# Altium PCB NanoPLC.PcbDoc
Units mm, origin at the board's own origin, x right, y up, seen from the top; angles counter-clockwise.
Board outline 117 x 88 mm, 2 copper layers (Top, Bottom); 94 components, 84 nets, 303 pads, 33 vias.
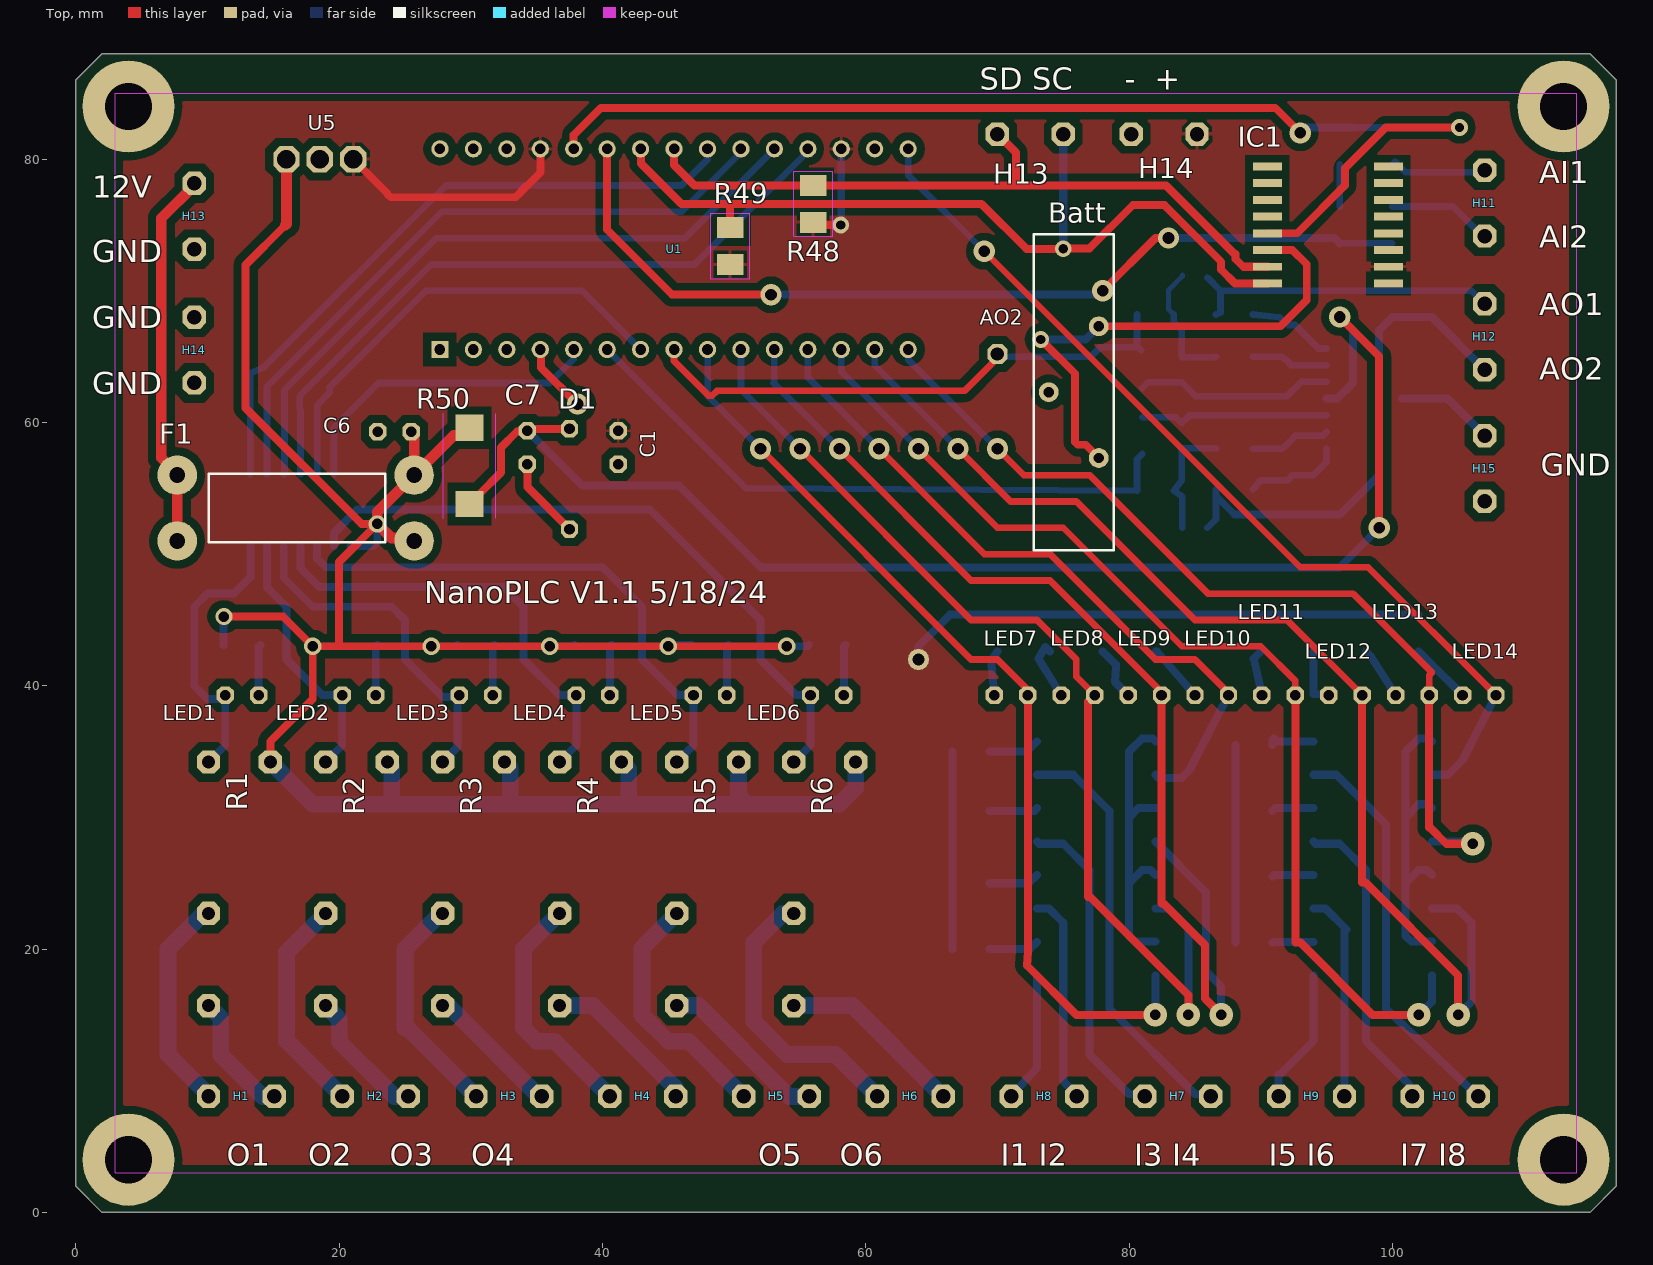
[diagram p0: Top view]
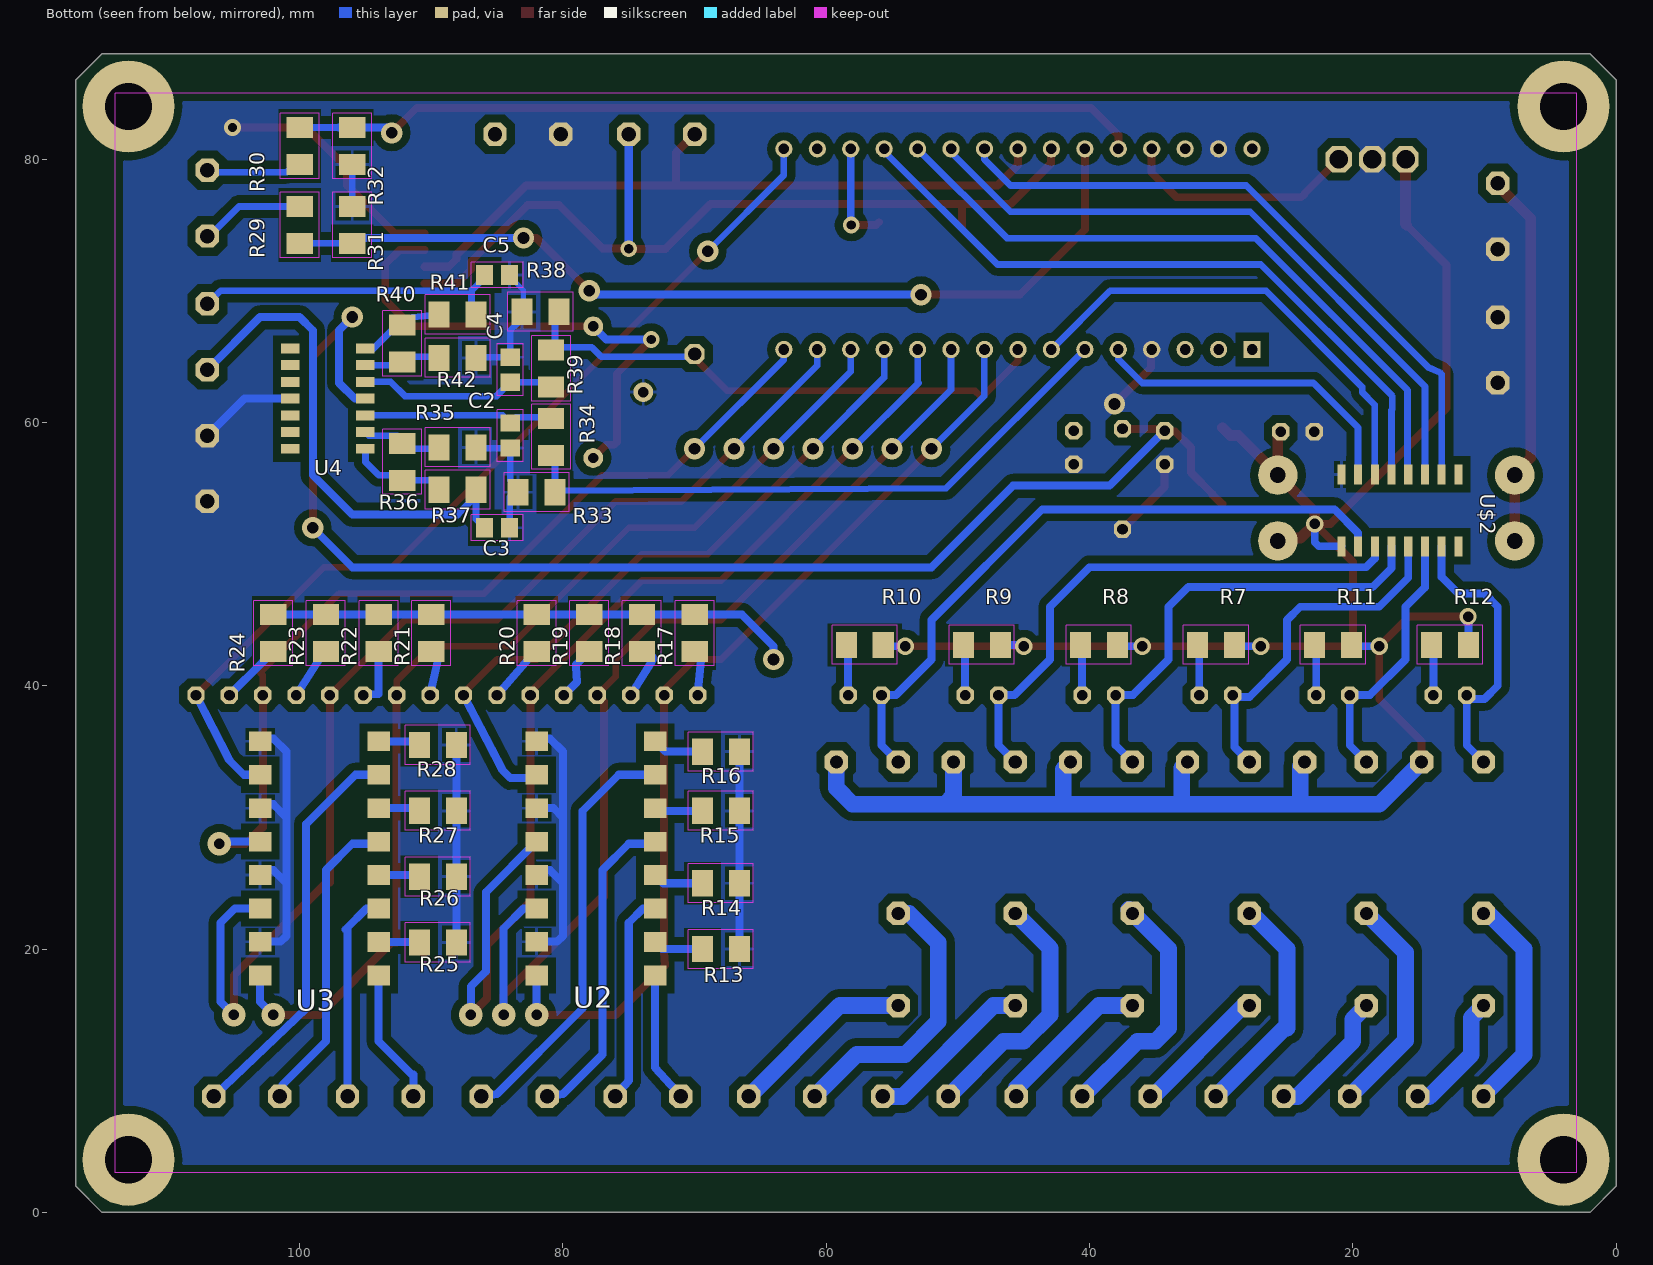
[diagram p1: Bottom view, seen from below]

## Layer stack, top to bottom
Top Solder: solder mask 0.0102, Solder Resist, Dk 3.5
Top: signal copper 0.035
Dielectric 1: dielectric 0.32, FR-4, Dk 4.8
Bottom: signal copper 0.035
Bottom Solder: solder mask 0.0102, Solder Resist, Dk 3.5

## Board outline
2,0 0,2 0,86 2,88 115,88 117,86 117,2 115,0

## Design rules (kind name [scope] priority, off if disabled: settings)
BoardOutlineClearance mdCopperDimension [All] p1: gap=0.254 ignorepadtopadclearanceinfootprint=FALSE except(0: Arc-SplitContinuation Track-SplitContinuation SMDPad-SplitContinuation THPad-SplitContinuation Via-SplitContinuation Fill-SplitContinuation Poly-SplitContinuation Region-SplitContinuation Text-SplitContinuation; 1.016: Poly-OutlineEdge Poly-CavityEdge Poly-CutoutEdge Poly-SplitBarrior)
Clearance Clearance_1 [InNamedPolygon('Polygon_1_Net_GND')] p1: gap=0.6 ignorepadtopadclearanceinfootprint=FALSE
Clearance 5VPoly [InNamedPolygon('Polygon_1_Net_+5V')] p2: gap=0.6 ignorepadtopadclearanceinfootprint=FALSE except(0.254: Arc-Arc Arc-Track Arc-SMDPad Track-Track Track-SMDPad)
Clearance Clearance_for_PolygonClass_Isolate_32 [InPolygonClass('Isolate_32') vs IsArc Or IsTrack Or IsPad Or IsVia Or IsFill Or IsRegion Or IsText] p3: gap=0.813 ignorepadtopadclearanceinfootprint=FALSE
Clearance "Clearance (Same Net)" [All] p4: gap=0.152 ignorepadtopadclearanceinfootprint=FALSE
Clearance [All] p5: gap=0.152 ignorepadtopadclearanceinfootprint=FALSE
ComponentClearance [All] p1: gap=0.127 collisioncheckmode=3 verticalgap=0.254 showdistances=FALSE
HoleSize [All] p1: absolutevalues=TRUE maxlimit=2540 minlimit=0.35 maxpercent=80.000 minpercent=20.000
HoleToHoleClearance mdDrill [All] p1: gap=0.152 allowstackedmicrovias=TRUE
MinimumSolderMaskSliver [All] p1 off: minsoldermaskwidth=0.254
PasteMaskExpansion mlMinCreamFrame [All] p1: expansion=0
PolygonConnect PolygonConnect_For_PolygonThermal_ON_Width200000_Gap100000 [InPolygonClass('PolygonThermal_ON_Width200000_Gap100000') vs Not IsVia] p1: connectstyle=Relief reliefconductorwidth=0.508 reliefentries=4 polygonreliefangle="90 Angle" airgapwidth=0.254
PolygonConnect ThermalVias [IsVia] p2: connectstyle=Direct reliefconductorwidth=0.254 reliefentries=4 polygonreliefangle="90 Angle" airgapwidth=0.254
PolygonConnect [All] p3: connectstyle=Relief reliefconductorwidth=0.254 reliefentries=4 polygonreliefangle="90 Angle" airgapwidth=0.254
RoutingVias [All] p1: holewidth=0.35 width=0.756 viastyle="Through Hole" minholewidth=0.35 minwidth=0.756 maxholewidth=2.54 maxwidth=2.54
SolderMaskExpansion mlMinStopFrame [All] p1: expansion=0.102 istentingtop=FALSE
Width [All] p1: maxlimit=1.524 minlimit=0.254 preferedwidth=0.584 minimp=50.000000 maximp=50.000000 favimp=50.000000
25 further rules are at their usual default settings.

## Components (designator, comment, footprint, x,y, rotation, side; value= is the part's Value field where it differs from the comment)
AO2 "PINHD-1X1" 1X01 70,65.2 r0 top
Batt "BatteryHolder_20mm" BatteryHolderVertical 77.7,62.3 r180 top (schematic designator BATT)
C1 "CAPACITOR, American symbol" C025-040X050 41.2,58.1 r270 top
C2 "C-USC0805" C0805 84,59 r270 bottom
C3 "C-USC0805" C0805 85,52 r180 bottom
C4 "C-USC0805" C0805 84,64 r90 bottom
C5 "C-USC0805" C0805 85,71.2 r180 bottom
C6 "CAPACITOR, American symbol" C025-040X050 24.2,59.3 r180 top
C7 "CAPACITOR, American symbol" C025-040X050 34.3,58.1 r270 top
D1 "Zener" 0204$7 37.5,55.7 r90 top
F1 "RESISTOR, American symbol" 20mm_Fuseholder 7.7,53.5 r0 top
H1 "TERMBLOCK_5MM_2POS" TERMBLOCK_5MM_2POS 10.08,8.81 r0 top
H2 "TERMBLOCK_5MM_2POS" TERMBLOCK_5MM_2POS 20.24,8.81 r0 top
H3 "TERMBLOCK_5MM_2POS" TERMBLOCK_5MM_2POS 30.4,8.81 r0 top
H4 "TERMBLOCK_5MM_2POS" TERMBLOCK_5MM_2POS 40.56,8.81 r0 top
H5 "TERMBLOCK_5MM_2POS" TERMBLOCK_5MM_2POS 50.72,8.81 r0 top
H6 "TERMBLOCK_5MM_2POS" TERMBLOCK_5MM_2POS 60.88,8.81 r0 top
H7 "TERMBLOCK_5MM_2POS" TERMBLOCK_5MM_2POS 81.2,8.81 r0 top
H8 "TERMBLOCK_5MM_2POS" TERMBLOCK_5MM_2POS 71.04,8.81 r0 top
H9 "TERMBLOCK_5MM_2POS" TERMBLOCK_5MM_2POS 91.36,8.81 r0 top
H10 "TERMBLOCK_5MM_2POS" TERMBLOCK_5MM_2POS 101.52,8.81 r0 top
H11 "TERMBLOCK_5MM_2POS" TERMBLOCK_5MM_2POS 107,74.16 r90 top
H12 "TERMBLOCK_5MM_2POS" TERMBLOCK_5MM_2POS 107,64 r90 top
H13 "TERMBLOCK_5MM_2POS" TERMBLOCK_5MM_2POS 75,81.9 r180 top
H13 "TERMBLOCK_5MM_2POS" TERMBLOCK_5MM_2POS 9,78.16 r270 top
H14 "TERMBLOCK_5MM_2POS" TERMBLOCK_5MM_2POS 85.16,81.9 r180 top
H14 "TERMBLOCK_5MM_2POS" TERMBLOCK_5MM_2POS 9,68 r270 top
H15 "TERMBLOCK_5MM_2POS" TERMBLOCK_5MM_2POS 107,54 r90 top
IC1 "Check availability" SO16W 95.1,75 r90 top
LED1 "LED3MM" LED3MM 12.62,39.29 r180 top
LED2 "LED3MM" LED3MM 21.51,39.29 r180 top
LED3 "LED3MM" LED3MM 30.4,39.29 r180 top
LED4 "LED3MM" LED3MM 39.29,39.29 r180 top
LED5 "LED3MM" LED3MM 48.18,39.29 r180 top
LED6 "LED3MM" LED3MM 57.07,39.29 r180 top
LED7 "LED3MM" LED3MM 71.04,39.29 r0 top
LED8 "LED3MM" LED3MM 76.12,39.29 r0 top
LED9 "LED3MM" LED3MM 81.2,39.29 r0 top
LED10 "LED3MM" LED3MM 86.28,39.29 r0 top
LED11 "LED3MM" LED3MM 91.36,39.29 r0 top
LED12 "LED3MM" LED3MM 96.44,39.29 r0 top
LED13 "LED3MM" LED3MM 101.52,39.29 r0 top
LED14 "LED3MM" LED3MM 106.6,39.29 r0 top
R1 "G5NB-1A-E-12VDC" G5NB-1A-E-12VDC 10.08,34.21 r270 top
R2 "G5NB-1A-E-12VDC" G5NB-1A-E-12VDC 18.97,34.21 r270 top
R3 "G5NB-1A-E-12VDC" G5NB-1A-E-12VDC 27.86,34.21 r270 top
R4 "G5NB-1A-E-12VDC" G5NB-1A-E-12VDC 36.75,34.21 r270 top
R5 "G5NB-1A-E-12VDC" G5NB-1A-E-12VDC 45.64,34.21 r270 top
R6 "G5NB-1A-E-12VDC" G5NB-1A-E-12VDC 54.53,34.21 r270 top
R7 "R-US_M1206" M1206 30.4,43.1 r0 bottom
R8 "R-US_M1206" M1206 39.29,43.1 r0 bottom
R9 "R-US_M1206" M1206 48.18,43.1 r0 bottom
R10 "R-US_M1206" M1206 57.07,43.1 r0 bottom
R11 "R-US_M1206" M1206 21.51,43.1 r0 bottom
R12 "R-US_M1206" M1206 12.62,43.1 r0 bottom
R13 "R-US_M1206" M1206 68,20 r0 bottom
R14 "R-US_M1206" M1206 68,25 r0 bottom
R15 "R-US_M1206" M1206 68,30.5 r0 bottom
R16 "R-US_M1206" M1206 68,35 r0 bottom
R17 "R-US_M1206" M1206 70,44 r90 bottom
R18 "R-US_M1206" M1206 74,44 r90 bottom
R19 "R-US_M1206" M1206 78,44 r90 bottom
R20 "R-US_M1206" M1206 82,44 r90 bottom
R21 "R-US_M1206" M1206 90,44 r90 bottom
R22 "R-US_M1206" M1206 94,44 r90 bottom
R23 "R-US_M1206" M1206 98,44 r90 bottom
R24 "R-US_M1206" M1206 102,44 r90 bottom
R25 "R-US_M1206" M1206 89.5,20.5 r0 bottom
R26 "R-US_M1206" M1206 89.5,25.5 r0 bottom
R27 "R-US_M1206" M1206 89.5,30.5 r0 bottom
R28 "R-US_M1206" M1206 89.5,35.5 r0 bottom
R29 "22k" M1206 100,75 r90 bottom
R30 "22k" M1206 100,81 r270 bottom
R31 "22k" M1206 96,75 r270 bottom
R32 "22k" M1206 96,81 r90 bottom
R33 "22K" M1206 82,54.7 r180 bottom
R34 "6k8" M1206 80.9,58.9 r90 bottom
R35 "22k" M1206 88,58.1 r0 bottom
R36 "22k" M1206 92.2,57 r270 bottom
R37 "330" M1206 88,54.9 r180 bottom
R38 "22K" M1206 81.7,68.4 r180 bottom
R39 "6k8" M1206 80.9,64.1 r270 bottom
R40 "22k" M1206 92.2,66 r90 bottom
R41 "330" M1206 88,68.2 r180 bottom
R42 "22k" M1206 88,64.9 r0 bottom
R48 "R-US_M1206" M1206 56,76.6 r270 top
R49 "R-US_M1206" M1206 49.7,73.4 r270 top
R50 "RESISTOR, American symbol" R2512W 29.9,56.7 r90 top
U1 "NANO" NANO 27.66,65.54 r0 top
U2 "LTV-847" SM-16 73,18 r0 bottom
U3 "LTV-847" SM-16 94,18 r0 bottom
U4 "LM224" SOIC-14_4MM 95,58 r0 bottom
U5 "L7805CV" TO-220 16,80 r0 top
U$2 "ULN2003" SOIC-16 16.43,53.26 r0 bottom

## Footprints (in the part's own frame and the unit in brackets; to place one, negate y for a bottom-side part, rotate by r counter-clockwise, add the part's x,y. Pads: shape width x height; smd on the part's side, far side on the other; paste and mask are expansions set on the pad)
1X01 [mil] "1X01"
  oct 60x60 / inner round 55.43 / far side oct 60x60 hole 40: 1(0,0)
  body extent -28,-28 28,28, height 150
20mm_Fuseholder [mm]
  round 3 hole 1.2: 1(0,-2.5) 1(0,2.5) 2(18,-2.5) 2(18,2.5)
  silkscreen extent 2.4,-2.6 15.8,2.6
0204$7 [mil]
  oct 52x52 / inner round 48.04 / far side oct 52x52 hole 32: 1(-150,0) 2(150,0)
BatteryHolderVertical [mm]
  round 1.5 hole 0.78: 1(0,5) 1(0,-5) 2(3.8,0)
  silkscreen extent -1.15,-12 4.95,12
C025-040X050 [mil]
  oct 52x52 / inner round 48.04 / far side oct 52x52 hole 32: 1(-50,0) 2(50,0)
C0805 [mm] "C0805"
  rect 1.3x1.5 smd: 1(-0.95,0) 2(0.95,0)
  Top keep-out lines w0.051: 1.973,0.983 1.973,-0.983 -1.973,-0.983 -1.973,0.983 1.973,0.983
G5NB-1A-E-12VDC [mil] "G5NB-1A-E-12VDC"
  oct 70x70 / inner round 64.67 / far side oct 70x70 hole 39.37: 1(0,0) 2(452.76,0) 3(728.35,0) 4(0,185.04)
LED3MM [mil] "LED3MM"
  oct 52x52 / inner round 48.04 / far side oct 52x52 hole 32: A(-50,0) K(50,0)
  body extent -85,-55 74,55, height 150
M1206 [mm] "M1206"
  rect 1.6x2 smd: 1(-1.4,0) 2(1.4,0)
  Top keep-out lines w0.051: -2.473,1.483 -2.473,-1.483 2.473,-1.483 2.473,1.483 -2.473,1.483
NANO [mil] "NANO"
  rect 51.5x51.5 / inner round 47.58 / far side rect 51.5x51.5 hole 31.5: 1(0,0)
  round 51.5 hole 31.5: 2(100,0) 3(200,0) 4(300,0) 5(400,0) 6(500,0) 7(600,0) 8(700,0) 9(800,0) 10(900,0) 11(1000,0) 12(1100,0) 13(1200,0) 14(1300,0) 15(1400,0) 16(1400,600) 17(1300,600) 18(1200,600) 19(1100,600) 20(1000,600) 21(900,600) 22(800,600) 23(700,600) 24(600,600) 25(500,600) 26(400,600) 27(300,600) 28(200,600) 29(100,600) 30(0,600)
R2512W [mm]
  rect 2x2.1 smd: 1(-2.896,0) 2(2.896,0)
  Top keep-out lines w0.051: -3.973,1.983 3.973,1.983 ; -3.973,-1.983 3.973,-1.983
SM-16 [mm] "SM-16"
  rect 1.7x1.5 smd: 1(0,0) 2(0,-2.54) 3(0,-5.08) 4(0,-7.62) 5(0,-10.16) 6(0,-12.7) 7(0,-15.24) 8(0,-17.78) 9(9,-17.78) 10(9,-15.24) 11(9,-12.7) 12(9,-10.16) 13(9,-7.62) 14(9,-5.08) 15(9,-2.56) 16(9,0)
SO16W [mm]
  rect 0.6x2.2 smd: 1(-4.445,-4.6) 2(-3.175,-4.6) 3(-1.905,-4.6) 4(-0.635,-4.6) 5(0.635,-4.6) 6(1.905,-4.6) 7(3.175,-4.6) 8(4.445,-4.6) 9(4.445,4.6) 10(3.175,4.6) 11(1.905,4.6) 12(0.635,4.6) 13(-0.635,4.6) 14(-1.905,4.6) 15(-3.175,4.6) 16(-4.445,4.6)
SOIC-14_4MM [mm] "SOIC-14_4MM"
  rect 1.4x0.75 smd: 1(0,0) 2(0,-1.27) 3(0,-2.54) 4(0,-3.81) 5(0,-5.08) 6(0,-6.35) 7(0,-7.62) 8(5.72,-7.62) 9(5.72,-6.35) 10(5.72,-5.08) 11(5.72,-3.81) 12(5.72,-2.54) 13(5.72,-1.27) 14(5.72,0)
SOIC-16 [mil] "SOIC-16"
  rect 24x60 smd: 1(-175,-110) 2(-125,-110) 3(-75,-110) 4(-25,-110) 5(25,-110) 6(75,-110) 7(125,-110) 8(175,-110) 9(175,105) 10(125,105) 11(75,105) 12(25,105) 13(-25,105) 14(-75,105) 15(-125,105) 16(-175,105)
TERMBLOCK_5MM_2POS [mil] "TERMBLOCK_5MM_2POS"
  oct 70x70 / inner round 64.67 / far side oct 70x70 hole 43.3: 1(0,0) 2(196.85,0)
TO-220 [mm] "TO-220"
  oct 2x2 / inner round 1.848 / far side oct 2x2 hole 1.4: 1(0,0) 2(2.54,0) 3(5.08,0)

## Part data
AO2: "PIN HEADER", DeviceSetName=PINHD-1X1, GateName_1=G$1, LibraryName=pinhead, POPULARITY=64, SymbolName_1=PINHD1
C1 C6 C7: library part C-US025-040X050, PACKAGE=C025-040X050, DeviceName=025-040X050, DeviceSetName=C-US, GateName_1=G$1, LibraryName=DR, SymbolName_1=C-US
C2 C3 C4 C5: "CAPACITOR, American symbol", DeviceName=C0805, DeviceSetName=C-US, GateName_1=G$1, LibraryName=DR, SymbolName_1=C-US
D1: library part R-US_0207/7, PACKAGE=0207/7, DeviceName=0207/7, DeviceSetName=R-US_, GateName_1=G$1, LibraryName=DR, SymbolName_1=R-US
F1: library part R-US_M5923_1, PACKAGE=M5923, DeviceName=M5923, DeviceSetName=R-US_, GateName_1=G$1, LibraryName=DR, SymbolName_1=R-US
IC1: library part DS3231/SO, PACKAGE="SOIC-16 Maxim Integrated", AVAILABILITY="In Stock", CHECK_PRICES=https://www.snapeda.com/parts/DS3231/Analog+Devices/view-part/?ref=eda, DeviceName=/SO, DeviceSetName=DS3231, GateName_1=G$1, LibraryName=DR, MF="Analog Devices", MP=DS3231, PRICE=None, SNAPEDA_LINK=https://www.snapeda.com/parts/DS3231/Analog+Devices/view-part/?ref=snap, SymbolName_1=DS3231
LED1 LED2 LED3 LED4 LED5 LED6 LED7 LED8 LED9 LED10 LED11 LED12 LED13 LED14: "LED   OSRAM: - CHIPLED LG R971, LG N971, LY N971, LG Q971, LY Q971, LO R971, LY R971 LH N974, LH R974 LS Q976, LO Q976, LY Q976 LO Q996 - Hyper CHIPLED LW Q18S LB Q993, LB Q99A, LB R99A - SideLED LS A670, LO A670, LY A670, LG A670, LP A670 LB A673, LV A673, LT A673, LW A673 LH A674 LY A675 LS A676, LA A676, LO A676, LY A676, LW A676 LS A679, LY A679, LG A679 -  Hyper Micro SIDELEDÂ® LS Y876, LA Y876, LO Y876, LY Y876 LT Y87S - SmartLED LW L88C, LW L88S LB L89C, LB L89S, LG L890 LS L89K, LO L89K, LY L89K LS L896, LA L896, LO L896, LY L896 - TOPLED LS T670, LO T670, LY T670, LG T670, LP T670 LSG T670, LSP T670, LSY T670, LOP T670, LYG T670 LG T671, LOG T671, LSG T671 LB T673, LV T673, LT T673, LW T673 LH T674 LS T676, LA T676, LO T676, LY T676, LB T676, LH T676, LSB T676, LW T676 LB T67C, LV T67C, LT T67C, LS T67K, LO T67K, LY T67K, LW E67C LS E67B, LA E67B, LO E67B, LY E67B, LB E67C, LV E67C, LT E67C LW T67C LS T679, LY T679, LG T679 LS T770, LO T770, LY T770, LG T770, LP T770 LB T773, LV T773, LT T773, LW T773 LH T774 LS E675, LA E675, LY E675, LS T675 LS T776, LA T776, LO T776, LY T776, LB T776 LHGB T686 LT T68C, LB T68C - Hyper Mini TOPLEDÂ® LB M676 - Mini TOPLED SantanaÂ® LG M470 LS M47K, LO M47K, LY M47K    Source: http://www.osram.convergy.de   LUXEON: - LUMILEDÂ® LXK2-PW12-R00, LXK2-PW12-S00, LXK2-PW14-U00, LXK2-PW14-V00 LXK2-PM12-R00, LXK2-PM12-S00, LXK2-PM14-U00 LXK2-PE12-Q00, LXK2-PE12-R00, LXK2-PE12-S00, LXK2-PE14-T00, LXK2-PE14-U00 LXK2-PB12-K00, LXK2-PB12-L00, LXK2-PB12-M00, LXK2-PB14-N00, LXK2-PB14-P00, LXK2-PB14-Q00 LXK2-PR12-L00, LXK2-PR12-M00, LXK2-PR14-Q00, LXK2-PR14-R00 LXK2-PD12-Q00, LXK2-PD12-R00, LXK2-PD12-S00 LXK2-PH12-R00, LXK2-PH12-S00 LXK2-PL12-P00, LXK2-PL12-Q00, LXK2-PL12-R00    Source: www.luxeon.com   KINGBRIGHT:   KA-3528ASYC Source: www.kingbright.com", DeviceName=3MM, DeviceSetName=LED, GateName_1=G$1, LibraryName=led, POPULARITY=97, SymbolName_1=LED
R7 R8 R9 R10 R11 R12 R13 R14 R15 R16 R17 R18 R19 R20 R21 R22 R23 R24 R25 R26 R27 R28 R48 R49: "RESISTOR, American symbol", DeviceName=M1206, DeviceSetName=R-US_, GateName_1=G$1, LibraryName=DR, SymbolName_1=R-US
R29 R30 R31 R32 R33 R34 R35 R36 R37 R38 R39 R40 R41 R42: library part R-US_M1206, "RESISTOR, American symbol", DeviceName=M1206, DeviceSetName=R-US_, GateName_1=G$1, LibraryName=DR, SymbolName_1=R-US
R50: library part R-US_R2512W, PACKAGE=R2512W, DeviceName=R2512W, DeviceSetName=R-US_, GateName_1=G$1, LibraryName=DR, SymbolName_1=R-US
U2 U3: "OptoIsolator", DeviceSetName=LTV-847, GateName_1=G$1, LibraryName=DR, SymbolName_1=LTV-847
U4: "LM224 Op Amp", DeviceSetName=LM224, GateName_1=G$1, LibraryName=DR, lm224=lm224, SymbolName_1=LM224
H1 H2 H3 H4 H5 H6 H7 H8 H9 H10 H11 H12 H13 H13 H14 H14 H15: DeviceSetName=TERMBLOCK_5MM_2POS, GateName_1=G$1, LibraryName=DR, SymbolName_1=PINHEAD-2
R1 R2 R3 R4 R5 R6: DeviceSetName=G5NB-1A-E-12VDC, GateName_1=G$1, LibraryName=DR, SymbolName_1=RELAY_SPST
U1: DeviceSetName=NANO, GateName_1=G$1, ICSP=ICSP, LibraryName=DR, SymbolName_1=NANO
U5: 7805=7805, DeviceSetName=L7805CV, GateName_1=G$1, LibraryName=DR, SymbolName_1=7805
U$2: DeviceSetName=ULN2003, GateName_1=G$1, LibraryName=DR, SymbolName_1=UNL2003, UNL2003=UNL2003

## Free pads (board coordinates)
  round 7 hole 3.6: 2(4,4) 2(4,84) 2(113,4) 2(113,84)

## Via types
v1: diameter 1.6/1.6 (per signal layer), hole 0.9, Top to Bottom, 16 vias
v2: diameter 1.3/1.3 (per signal layer), hole 0.8, Top to Bottom, 7 vias
v3: diameter 1.778/1.778 (per signal layer), hole 0.8, Top to Bottom, 6 vias
v4: diameter 1.27, hole 0.711, Top to Bottom, 4 vias

## Nets (pads, with @x,y where several pads share a name; then routed paths per layer and width w, separated by ;. In a path a pad name is that pad's centre, name@x,y a point inside that pad or via, vN(x,y) a via of type N, cw(c..) or ccw(c..) an arc to the next point about the centre after c; other vN are vias at no path point)
+5V: C1.1 H14.1@85.16,81.9 IC1.2 R17.2 R18.2 R19.2 R20.2 R21.2 R22.2 R23.2 R24.2 R48.2 R49.2 U1.18 U1.27 U5.3 | length 66
  Top w0.584: U5.3 23.7,77.38 23.7,77.316 23.916,77.1 33.4,77.1 35.3,79 35.3,80.76 U1.27 ; R48.2 56.2,75 v4(58.1,75)
  Bottom w0.584: v4(58.1,75) 58.14,75.04 U1.18
  Bottom w0.61: v1(64,42) 64,43 66.4,45.4 R17.2 R18.2 R19.2 R20.2 R21.2 R22.2 R23.2 R24.2
+11V: C7.1 D1.2 R50.1 U4.4 | length 106.5
  Top w0.61: R50.1 29.95,53.804 30.645,54.499 30.645,54.549 32.3,56.204 32.3,58.1 33.497,59.297 34.227,59.297 C7.1 34.44,59.51 D1.2 ; v1(96,68) 99,65 v1(99,52)
  Bottom w0.61: C7.1 38.47,55.2 45.8,55.2 52,49 96,49 v1(99,52) ; U4.4 95.81,61.81 97,63 97,67 v1(96,68)
+12V: C6.1 F1.2 R1.4 R2.4 R3.4 R4.4 R5.4 R6.4 R7.1 R8.1 R9.1 R10.1 R11.1 R12.1 R50.2 U5.1 U$2.9 | length 192.9
  Top w0.6: v2(11.25,45.25) 15.75,45.25 v2(18,43) ; R1.4 14.78,35.78 18,39 v2(18,43) ; v2(22.9,52.3) 20,49.4 20,43 ; v2(54,43) v2(45,43) v2(36,43) v2(27,43) 20,43 ; v2(18,43) 20,43
  Top w0.61: 15.903,74.972 12.9,71.97 12.9,61.1 21.7,52.3 v2(22.9,52.3)
  Top w0.813: 15.903,74.972 16,75.07 U5.1 ; C6.1 25.47,59.208 25.7,58.978 F1.2@25.7,56 ; F1.2@25.7,51 25.477,51.223 23.977,51.223 v2(22.9,52.3) 22.9,53.2 F1.2@25.7,56 ; R50.2 29.306,59.003 28.703,59.003 F1.2@25.7,56
  Bottom w0.6: R12.1 11.22,44.72 11.5,45 v2(11.25,45.25) ; v2(18,43) 20.01,43 R11.1 ; U$2.9 22.593,50.593 22.9,50.9 v2(22.9,52.3) ; v2(27,43) 28.9,43 R7.1 ; v2(36,43) 37.79,43 R8.1 ; v2(45,43) 45.1,43.1 R9.1 ; v2(54,43) 55.57,43 R10.1
  Bottom w1.27: R1.4 17.99,31 24,31 ; R2.4 24,33.88 24,31 ; R3.4 33,33.77 33,31 ; R4.4 42,33.66 42,31 ; R5.4 50.34,31.66 51,31 ; R6.4 59.23,32.23 58,31 51,31 ; 24,31 33,31 ; 33,31 42,31 ; 42,31 51,31
AI1: R29.1 R31.2 U1.25 | length 69.8
  Top w0.61: U1.25 40.36,74.64 45.3,69.7 v1(52.8,69.7) ; v1(78,70) 82,74 v1(83,74)
  Bottom w0.508: R31.2 R29.1
  Bottom w0.61: v1(52.8,69.7) 77.432,69.7 77.732,70 v1(78,70) ; v1(83,74) 95.6,74 R31.2
AI2: R30.1 R32.2 U1.26 | length 66
  Top w0.61: U1.26 37.82,81.82 39.9,83.9 91.1,83.9 v1(93,82)
  Bottom w0.508: R32.2 97,82.4 R30.1
  Bottom w0.61: v1(93,82) 93.4,82.4 97,82.4
AO1: R33.2 R34.1 U1.6 | length 47.6
  Bottom w0.508: U1.6 50.9,55 80.6,54.8 80.6,57.2 R34.1@81,57.6
AO2: AO2.1 R38.2 R39.1 U1.8 | length 41.8
  Top w0.508: U1.8 45.44,64.66 48.063,62.037 48.337,62.037 48.7,62.4 67.5,62.4 69.621,64.521 69.621,64.589 70,64.968 AO2.1
  Bottom w0.508: AO2.1 70.2,65 77.1,65 77.8,65.7 80.7,65.7 R39.1 ; R39.1@80.6,65.8 R38.2@80.6,68.2
DI1: LED7.K U1.9 U2.16 | length 72.4
  Top w0.508: v1(52,58) 68,42 70,42 72.31,39.69 LED7.K
  Top w0.61: LED7.K 72.31,19.771 72.23,18.77 76,15 v3(82,15)
  Bottom w0.508: U1.9 48,65.52 48,62 v1(52,58)
  Bottom w0.61: v3(82,15) U2.16
DI2: LED8.K U1.10 U2.14 | length 77.7
  Top w0.508: v1(55,58) 68,45 73,45 76,42 76,40.68 LED8.K
  Top w0.61: LED8.K 76.89,38.79 76.89,23.974 77.045,23.955 84.5,16.5 v3(84.5,15)
  Bottom w0.508: U1.10 50.52,62.48 v1(55,58)
  Bottom w0.61: U2.14 83,23.08 84.5,21.58 v3(84.5,15)
DI3: LED9.K U1.11 U2.12 | length 83.5
  Top w0.508: v1(58,58) 68,48 74,48 82.47,39.53 LED9.K
  Top w0.61: LED9.K 82.47,23.481 82.62,23.458 85.762,20.316 85.762,16.238 v3(87,15)
  Bottom w0.508: U1.11 53.06,63.06 53,63 v1(58,58)
  Bottom w0.61: U2.12 85.843,24.317 85.843,18.311 87,17.153 v3(87,15)
DI4: LED10.K U1.12 U2.10 | length 53.5
  Top w0.508: v1(61,58) 69,50 74,50 82,42 85,42 87.55,39.45 LED10.K
  Bottom w0.508: U1.12 55.6,63.4 v1(61,58)
  Bottom w0.61: U2.10 82.24,33 84,33 84.565,33.565 LED10.K
DI5: LED11.K U1.13 U3.16 | length 80.8
  Top w0.508: v1(64,58) 70,52 75,52 84,43 90,43 92.63,40.37 LED11.K
  Top w0.61: LED11.K 92.63,20.506 93.01,20.49 98.5,15 v3(102,15)
  Bottom w0.508: U1.13 58.14,63.86 v1(64,58)
  Bottom w0.61: v3(102,15) 103,16 U3.16
DI6: LED12.K U1.14 U3.14 | length 86.9
  Top w0.508: v1(67,58) 71,54 76,54 85,45 92,45 LED12.K
  Top w0.61: LED12.K 97.71,25.063 97.955,25.045 105,18 v3(105,15)
  Bottom w0.508: U1.14 60.68,64.32 v1(67,58)
  Bottom w0.61: U3.14 104.92,23.08 106,22 106,16 v3(105,15)
DI7: LED13.K U1.15 U3.12 | length 69.2
  Top w0.508: v1(70,58) 72,56 77,56 86,47 97,47 103,41 102.79,40.79 LED13.K
  Top w0.61: LED13.K 102.79,29.218 102.9,29.195 104.095,28 v3(106.095,28)
  Bottom w0.508: U1.15 63.22,64.78 v1(70,58)
  Bottom w0.61: U3.12 105.519,28.16 105.679,28 v3(106.095,28)
DI8: LED14.K U1.16 U3.10 | length 71.4
  Top w0.508: v1(69,73) 93,49 98.16,49 LED14.K
  Bottom w0.508: U1.16 63.22,78.78 v1(69,73)
  Bottom w0.61: U3.10 104.24,33.24 105.345,34.345 LED14.K
GND: Batt.2 C1.2 C2.2 C3.2 C4.2 C5.2 C6.2 C7.2 D1.1 H13.2@9,73.16 H14.1@9,68 H14.2 H15.1 H15.2 IC1.13 R13.1 R14.1 R15.1 R16.1 R25.1 R26.1 R27.1 R28.1 R31.1 R32.1 R33.1 R35.1 R38.1 R42.1 U1.4 U1.29 U2.9 U2.11 U2.13 U2.15 U3.9 U3.11 U3.13 U3.15 U4.11 U5.2 U$2.8 | length 137.2
  Top w0.584: IC1.13 92.765,74.365 96.4,78 96.4,79.3 99.5,82.4 v4(105.1,82.4)
  Top w0.61: C7.2 34.3,55.09 D1.1 ; U1.4 35.339,65.481 35.339,64.161 v1(38.1,61.4)
  Bottom w0.381: R38.1@83.4,68.2 83,68.6 83,70.05 84.05,71.1 C5.2
  Bottom w0.508: R38.1@83.4,68.2 83.4,67.6 84,67 C4.2 86.55,64.95 R42.1@86.6,65 ; C3.2 84.05,54.35 83.4,54.8 84,55.6 C2.2 86.55,58.05 R35.1@86.6,58 ; R31.1 R32.1
  Bottom w0.61: R13.1 R14.1 R15.1 R16.1 ; U2.15 80.44,20.56 80,21 80,25 ; U2.13 81.62,26 81,26 80,25 ; U2.11 80.7,30.7 80,30 ; U2.9 81.78,36 81,36 80,35 80,30 ; R25.1 R26.1 R27.1 R28.1 ; U4.11 104.19,61.81 H15.2 ; U3.15 101.44,20.56 101,21 101,25 ; U3.13 102.62,26 102,26 101,25 ; U3.11 102.7,31 102,31 101,30 ; U3.9 102.78,36 102,36 101,35 101,30 ; 80,25 80,30 ; 101,25 101,30
NetBatt_1: Batt.1 IC1.14 | length 38.8
  Top w0.584: v4(73.3,66.3) 75.9,63.7 75.9,58.516 76.116,58.3 76.7,58.3 Batt.1@77.7,57.3 ; Batt.1@77.7,67.3 91.5,67.3 93.5,69.3 93.5,72 92.405,73.095 IC1.14
  Bottom w0.584: v4(73.3,66.3) 76.7,66.3 Batt.1@77.7,67.3
NetC2_1: C2.1 R34.2 U4.3 | length 14.4
  Bottom w0.508: R34.2@81,60.4 83.55,60.4 C2.1 84.59,60.54 U4.3
NetC3_1: C3.1 H12.1 R37.2 | length 39
  Bottom w0.508: C3.1 86.6,52.65 R37.2@86.6,54.4 ; 88,53 R37.2@86.6,54.4 ; R37.2@86.6,54.4 R37.2 R37.2@86.6,54.4
  Bottom w0.61: 88,53 96,53 99,56 99,67 100,68 103,68 H12.1
NetC4_1: C4.1 R39.2 U4.5 | length 15.1
  Bottom w0.508: R39.2@81,62.6 81.45,63.05 C4.1 85.05,62 92,62 93.08,63.08 U4.5
NetC5_1: C5.1 H12.2 R41.2 | length 23.9
  Bottom w0.508: C5.1@85.95,71 86.95,70 ; R41.2 86.95,68.35 86.95,70 ; H12.2 106,70 86.95,70
NetF1_1: F1.1 H13.1@9,78.16 | length 28.5
  Top w0.813: F1.1@7.7,51 7.7,56 7.7,56.112 6.5,57.312 6.5,75.5 H13.1@9,78
NetH1_1: H1.1 R1.2 | length 16.7
  Bottom w0.6: R1.2@9.71,22.71 R1.2
  Bottom w1.016: H1.1 H1.1@10.08,8.92
  Bottom w1.27: R1.2@9.71,22.71 7,20 7,12 H1.1@10.08,8.92
NetH1_2: H1.2 R1.3 | length 9.5
  Bottom w1.27: R1.3 11,14.79 11,12 14.19,8.81 H1.2
NetH2_1: H2.1 R2.2 | length 16.9
  Bottom w1.27: R2.2 16,19.74 16,13.05 H2.1
NetH2_2: H2.2 R2.3 | length 10.1
  Bottom w1.27: R2.3 20,14.68 20,13 24.19,8.81 H2.2
NetH3_1: H3.1 R3.2 | length 17.5
  Bottom w1.27: R3.2 27.71,22.71 25,20 25,14 25.21,14 H3.1
NetH3_2: H3.2 R3.3 | length 10.4
  Bottom w1.27: R3.3 28.29,15.71 35.19,8.81 H3.2
NetH4_1: H4.1 R4.2 | length 19.3
  Bottom w1.27: R4.2 37,22.96 37,23 34,20 34,14 35,13 36.37,13 H4.1
NetH4_2: H4.2 R4.3 | length 12
  Bottom w1.27: R4.3 39.29,15.71 45.56,9.44 H4.2
NetH5_1: H5.1 R5.2 | length 19.1
  Bottom w1.27: R5.2 43,20.07 43,15 45,13 46.53,13 H5.1
NetH5_2: H5.2 R5.3 | length 12.9
  Bottom w1.27: R5.3 47.29,15.71 54.19,8.81 H5.2
NetH6_1: H6.1 R6.2 | length 21.7
  Bottom w1.27: R6.2 53.71,22.71 51.5,20.5 51.5,14.5 54,12 57.69,12 H6.1
NetH6_2: H6.2 R6.3 | length 14.2
  Bottom w1.27: R6.3 58.98,15.71 H6.2
NetH7_1: H7.1 U2.5 | length 24.4
  Bottom w0.61: U2.5 73.16,28 75,28 77,26 77,12 80,9 H7.1
NetH7_2: H7.2 U2.7 | length 32
  Bottom w0.61: U2.7 75.76,33.24 78.5,30.5 78.5,15.5 85,9 H7.2
NetH8_1: H8.1 U2.1 | length 9.9
  Bottom w0.61: H8.1 73,11 U2.1
NetH8_2: H8.2 U2.3 | length 16
  Bottom w0.61: U2.3 73.92,23.08 75,22 75,10 H8.2
NetH9_1: H9.1 U3.1 | length 10.4
  Bottom w0.61: H9.1 91.36,10.463 91.384,10.384 94,13 U3.1
NetH9_2: H9.2 U3.3 | length 16
  Bottom w0.61: U3.3 94.92,23.08 96.5,21.5 96.36,21.496 H9.2
NetH10_1: H10.1 U3.5 | length 23.5
  Bottom w0.61: U3.5 94.16,28 96,28 98,26 98,13 101.311,9.689 H10.1
NetH10_2: H10.2 U3.7 | length 30.7
  Bottom w0.61: U3.7 95.76,33.24 99.5,29.5 99.5,15.5 H10.2
NetH11_1: H11.1 R29.2 | length 8
  Bottom w0.508: R29.2 104.6,76.4 H11.1@107,74
NetH11_2: H11.2 R30.2 | length 7.4
  Bottom w0.508: R30.2 100.193,79.807 101,79 H11.2@107,79
NetH13_1: H13.1@75,81.9 IC1.16 R49.1 U1.24 | length 66.1
  Top w0.61: U1.24 42.931,80.749 42.931,79.669 46,76.6 49.8,76.6 ; R49.1 49.7,76.5 49.8,76.6 ; IC1.16 88.045,70.555 87,71.6 87,72.2 82.7,76.5 80.281,76.5 76.981,73.2 75.01,73.2 v4(75,73.19) 72.21,73.19 68.8,76.6 49.8,76.6
  Bottom w0.61: v4(75,73.19) H13.1@75,81.9
NetH13_2: H13.2@70,81.9 IC1.15 R48.1 U1.23 | length 54.2
  Top w0.61: U1.23 45.44,79.56 47,78 R48.1 71.4,78 ; H13.2@70,81.9 71.4,80.5 71.4,78 ; IC1.15 88.675,71.825 88.1,72.4 88.1,72.8 88,72.8 82.8,78 71.4,78
NetLED1_A: LED1.A R12.2 | length 3.9
  Bottom w0.6: LED1.A 13.89,42.97 R12.2
NetLED1_K: LED1.K R1.1 U$2.15 | length 22
  Bottom w0.6: R1.1 11.35,35.48 LED1.K 11.06,39 10,39 9,40 9,46 10,47 12,47 13.255,48.255 U$2.15
NetLED2_A: LED2.A R11.2 | length 3.9
  Bottom w0.6: LED2.A 22.78,42.97 R11.2
NetLED2_K: LED2.K R2.1 U$2.14 | length 20.2
  Bottom w0.6: U$2.14 14.525,47.475 16,46 16,42 18.71,39.29 LED2.K 20.24,35.48 R2.1
NetLED3_A: LED3.A R7.2 | length 3.9
  Bottom w0.6: LED3.A 31.67,42.97 R7.2
NetLED3_K: LED3.K R3.1 U$2.13 | length 26.7
  Bottom w0.6: U$2.13 15.795,48.205 18,46 24,46 25,45 25,42 27.84,39.16 LED3.K@29,39.16 ; R3.1 29,35.35 LED3.K@29,39.16 ; LED3.K LED3.K@29,39.16
NetLED4_A: LED4.A R8.2 | length 3.9
  Bottom w0.6: LED4.A 40.56,42.97 R8.2
NetLED4_K: LED4.K R4.1 U$2.12 | length 34.6
  Bottom w0.6: U$2.12 17.065,48.935 18.5,47.5 32.5,47.5 34,46 34,42 36.71,39.29 LED4.K 38.02,35.48 R4.1
NetLED5_A: LED5.A R9.2 | length 3.9
  Bottom w0.6: LED5.A 49.45,42.97 R9.2
NetLED5_K: LED5.K R5.1 U$2.11 | length 41.7
  Bottom w0.6: U$2.11 18.335,49.665 19,49 40,49 43,46 43,42 45.71,39.29 LED5.K 46.91,35.48 R5.1
NetLED6_A: LED6.A R10.2 | length 3.9
  Bottom w0.6: LED6.A 58.34,42.97 R10.2
NetLED6_K: LED6.K R6.1 U$2.10 | length 51.2
  Bottom w0.6: U$2.10 19.605,51.605 21.402,53.402 43.597,53.402 52,45 52,42 54.71,39.29 LED6.K 55.8,35.48 R6.1
NetLED7_A: LED7.A R17.1 | length 3.5
  Bottom w0.61: LED7.A 69.522,41.92 R17.1
NetLED8_A: LED8.A R18.1 | length 4.8
  Bottom w0.61: R18.1 73.64,42.96 73.135,42.065 LED8.A
NetLED9_A: LED9.A R19.1 | length 4.1
  Bottom w0.61: R19.1 79,41.6 79,41.41 78.93,40.29 LED9.A
NetLED10_A: LED10.A R20.1 | length 4.5
  Bottom w0.61: R20.1 82.13,42.6 LED10.A
NetLED11_A: LED11.A R21.1 | length 3.6
  Bottom w0.61: R21.1 89.47,42.07 LED11.A
NetLED12_A: LED12.A R22.1 | length 4.4
  Bottom w0.61: R22.1 94,39.375 LED12.A
NetLED13_A: LED13.A R23.1 | length 4
  Bottom w0.61: R23.1 98.36,42.24 LED13.A
NetLED14_A: LED14.A R24.1 | length 4.7
  Bottom w0.61: R24.1 102.805,41.795 LED14.A
NetR13_2: R13.2 U2.2 | length 3.8
  Bottom w0.61: R13.2 72.46,20 U2.2
NetR14_2: R14.2 U2.4 | length 3.9
  Bottom w0.61: R14.2 72.38,25 U2.4
NetR15_2: R15.2 U2.6 | length 3.7
  Bottom w0.61: R15.2 72.8,30.5 U2.6
NetR16_2: R16.2 U2.8 | length 3.9
  Bottom w0.61: R16.2 72.22,35 U2.8
NetR25_2: R25.2 U3.2 | length 3.1
  Bottom w0.61: R25.2 90.94,20.54 U3.2
NetR26_2: R26.2 U3.4 | length 3.1
  Bottom w0.61: R26.2 91.02,25.62 U3.4
NetR27_2: R27.2 U3.6 | length 3.2
  Bottom w0.61: R27.2 91.1,30.7 U3.6
NetR28_2: R28.2 U3.8 | length 3.6
  Bottom w0.61: R28.2 90.9,35.9 91,36 91.22,35.78 U3.8
NetR35_2: R35.2 R36.1 U4.2 | length 6.1
  Bottom w0.508: R35.2@89.4,58 91.6,58 92.1,58.4 92.6,59 94.73,59 U4.2
NetR36_2: R36.2 R37.1 U4.1 | length 7.5
  Bottom w0.508: R37.1 90,55.6 92.1,55.6 92.4,56 94,56 95,57 U4.1
NetR40_1: R40.1 R42.2 U4.6 | length 5.9
  Bottom w0.508: R42.2@89.4,65 91.6,65 92.1,64.6 92.25,64.35 U4.6
NetR40_2: R40.2 R41.1 U4.7 | length 6.6
  Bottom w0.508: R41.1 91.4,68 92.1,67.4 92.6,67.4 94.38,65.62 U4.7
NetU1_5: U1.5 U$2.7 | length 24.6
  Bottom w0.508: U$2.7 19.605,59.605 23,63 36,63 37.82,64.82 U1.5
R1: U1.22 U$2.2 | length 49.8
  Bottom w0.508: U$2.2 13.255,63.645 13.394,63.784 14.294,64.195 cw(c14.433,63.895) 14.295,64.195 14.338,64.238 28.1,78 46,78 47.98,79.98 U1.22
R2: U1.21 U$2.3 | length 50.3
  Bottom w0.508: U$2.3 14.525,62.725 27.8,76 46,76 50.52,80.52 U1.21
R3: U1.20 U$2.4 | length 51.2
  Bottom w0.508: U$2.4 15.854,56.113 15.854,62.454 27.4,74 46.28,74 U1.20
R4: U1.19 U$2.5 | length 52.5
  Bottom w0.508: U$2.5 17.065,60.935 17,61 17,62 27,72 47,72 55.6,80.6 U1.19
R5: U1.7 U$2.6 | length 35.5
  Bottom w0.508: U$2.6 18.335,61.335 19.3,62.3 19.3,62.7 26.6,70 38.44,70 U1.7
pads on no net: IC1.1 IC1.3 IC1.4 IC1.5 IC1.6 IC1.7 IC1.8 IC1.9 IC1.10 IC1.11 IC1.12 U1.1 U1.2 U1.3 U1.17 U1.28 U1.30 U4.8 U4.9 U4.10 U4.12 U4.13 U4.14 U$2.1 U$2.16

## Polygon pours and split planes (outlines as drawn)
+5V on Top "Polygon_1_Net_+5V" (solid, remove dead copper, pour order 0): -1,89.2 117,89.2 117,2 -1,0.2
GND on Bottom "Polygon_1_Net_GND" (solid, remove dead copper, pour order 1): 1.746,85.254 115.254,85.254 115.254,1.746 1.746,1.746

## Keep-outs
Keep-Out Layer:
  lines w0: 3,3 114,3 114,85 3,85 3,3

## Silkscreen, mask and mechanical layers (free items; w line width, h text height)
Top Overlay:
  text "SD SC" at 68.654,85.254 h1.7
  text "-  +" at 79.654,85.254 h1.7
  text "AI1" at 111.154,78.154 h1.7
  text "12V" at 1.254,77.054 h1.7
  text "AI2" at 111.154,73.257 h1.7
  text "GND" at 1.254,72.154 h1.7
  text "AO1" at 111.154,68.154 h1.7
  text "GND" at 1.254,67.154 h1.7
  text "AO2" at 111.154,63.257 h1.7
  text "GND" at 1.254,62.154 h1.7
  text "GND" at 111.258,55.942 h1.7
  text "NanoPLC V1.1 5/18/24" at 26.454,46.254 h1.7
  text "O1    O2    O3    O4" at 11.454,3.554 h1.7
  text "O5    O6" at 51.854,3.554 h1.7
  text "I1 I2" at 70.254,3.554 h1.7
  text "I3 I4" at 80.399,3.554 h1.7
  text "I5 I6" at 90.599,3.554 h1.7
  text "I7 I8" at 100.599,3.554 h1.7
Dimension:
  lines w0: 3,3 3,85 114,85 114,3 3,3
Unrouted:
  lines w0: 9,63 9,68 ; 66.6,30.5 82,30.7 ; 82,35.78 88.1,35.5 103,35.78 ; 84,58.05 84,64.95 ; 107,54 107,59

## Text inside footprints (layer, text, board x,y; h text height)
U1: tPlace "ICSP" at 60.68,74.43 h0.69 r270; tPlace "Mini-B USB" at 30.2,76.97 h0.52 r180; tPlace "1" at 27.66,66.81 h0.86; tPlace "Reset" at 51.79,71.89 h0.69 r90
U2: tPlace "1" at 74.7,19 h2.76 r180
U3: tPlace "1" at 95.7,19 h2.76 r180
U$2: tPlace "16" at 12.747,53.387 h1.57 r90